# EAGLE board Pellet Sorter Arduino and Driver Wiring TinkerCAD (EAGLE 9.7.0)

Size 225.5 x 136.48 mm. Coordinates in mm from the lower left corner, seen from the top.
Outline: 0,0 225.5,0 225.5,136.48 0,136.48 0,0
Copper layers (1*16): Top 0.035mm / dielectric 1.5mm / Bottom 0.035mm
Design rules "default": minimum track width 6mil, minimum drill 0.35mm, track to track 6mil, track to pad 6mil, pad to pad 6mil, via to via 6mil, smd to smd 6mil, copper to edge 40mil, drill to drill 6mil, minimum pad ring 10mil, minimum via ring 8mil, stop-mask expansion 4mil, vias tented up to drill 0mil, thermal gap 10mil

## Footprints (pad centres in the part's own frame; a part is rotated, then mirrored left to right if it is on the bottom)
CAP-THRU-2.54MM = drill 1.016 pad 1.88: 1 -1.27,0; 2 1.27,0
1X06 = drill 1.016 long: 1 -6.35,0; 2 -3.81,0; 3 -1.27,0; 4 1.27,0; 5 3.81,0; 6 6.35,0
BATTERY-GENERIC = drill 1.118 pad 3.15 octagon: + 2.54,0; - -2.54,0
ARDUINO-UNO-R3-SHIELD = drill 1.016 pad 1.88: 3.3V 24.13,-2.54; 5V 24.13,0; A0 24.13,12.7; A1 24.13,15.24; A2 24.13,17.78; A3 24.13,20.32; A4 24.13,22.86; A5 24.13,25.4; AREF -24.13,-13.97; D2 -24.13,20.32; D3 -24.13,17.78; D4 -24.13,15.24; D5 -24.13,12.7; D6 -24.13,10.16; D7 -24.13,7.62; D8 -24.13,3.81; D9 -24.13,1.27; D10 -24.13,-1.27; D11 -24.13,-3.81; D12 -24.13,-6.35; D13 -24.13,-8.89; GND@0 24.13,2.54; GND@1 24.13,5.08; GND@2 -24.13,-11.43; IOREF 24.13,-7.62; NC 24.13,-10.16; RES 24.13,-5.08; RX -24.13,25.4; SCL -24.13,-19.05; SDA -24.13,-16.51; TX -24.13,22.86; VIN 24.13,7.62
DIP762W53P254L1969H508Q16B = drill 0.743 pad 1.343: 1 -3.81,8.89; 2 -3.81,6.35; 3 -3.81,3.81; 4 -3.81,1.27; 5 -3.81,-1.27; 6 -3.81,-3.81; 7 -3.81,-6.35; 8 -3.81,-8.89; 9 3.81,-8.89; 10 3.81,-6.35; 11 3.81,-3.81; 12 3.81,-1.27; 13 3.81,1.27; 14 3.81,3.81; 15 3.81,6.35; 16 3.81,8.89

## Placement (x,y rotation side)
C1  100u  [CAP-THRU-2.54MM]  146.44,28.06 90 top
C2  100u  [CAP-THRU-2.54MM]  146.44,48.38 90 top
C3  100u  [CAP-THRU-2.54MM]  146.44,68.7 90 top
MBOTTOM_STEPPER_MOTOR_(SMALL)  PINHD-1X06_1X06M  [1X06]  218.67,41.89 270 top
MTOP_STEPPER_MOTOR_(NEMA17)  PINHD-1X06_1X06M  [1X06]  218.61,10.79 270 top
MVALVE_STEPPER_MOTOR_(SMALL)  PINHD-1X06_1X06M  [1X06]  219.22,67.06 270 top
P1  BATTERYGENERIC  [BATTERY-GENERIC]  145.14,128.22 180 top
U1  ARDUINO-UNO-R3-SHIELD  [ARDUINO-UNO-R3-SHIELD]  29.84,52.55 180 top
UA4988_DRIVER_-_BOTTOM  L293E  [DIP762W53P254L1969H508Q16B]  135.01,40.76 180 top
UA4988_DRIVER_-_TOP  L293E  [DIP762W53P254L1969H508Q16B]  134.92,19.91 180 top
UA4988_DRIVER_-_VALVE  L293E  [DIP762W53P254L1969H508Q16B]  135.01,61.08 180 top

## Library data of the parts
C1-C3 MBOTTOM_STEPPER_MOTOR_(SMALL) MTOP_STEPPER_MOTOR_(NEMA17) MVALVE_STEPPER_MOTOR_(SMALL) P1 U1 UA4988_DRIVER_-_BOTTOM UA4988_DRIVER_-_TOP UA4988_DRIVER_-_VALVE = Tinkercad

## Nets
MBOTTOM_STEPPER_MOTOR_(SMALL)_3: MBOTTOM_STEPPER_MOTOR_(SMALL).3 UA4988_DRIVER_-_BOTTOM.6
MBOTTOM_STEPPER_MOTOR_(SMALL)_5: MBOTTOM_STEPPER_MOTOR_(SMALL).5 UA4988_DRIVER_-_BOTTOM.3
MBOTTOM_STEPPER_MOTOR_(SMALL)_6: C1.1 C2.1 C3.1 MBOTTOM_STEPPER_MOTOR_(SMALL).4 MBOTTOM_STEPPER_MOTOR_(SMALL).6 MVALVE_STEPPER_MOTOR_(SMALL).4 MVALVE_STEPPER_MOTOR_(SMALL).6 P1.- U1.5V U1.GND@0 U1.GND@1 U1.GND@2 UA4988_DRIVER_-_BOTTOM.1 UA4988_DRIVER_-_BOTTOM.2 UA4988_DRIVER_-_BOTTOM.4 UA4988_DRIVER_-_BOTTOM.5 UA4988_DRIVER_-_BOTTOM.7 UA4988_DRIVER_-_BOTTOM.9 UA4988_DRIVER_-_BOTTOM.10 UA4988_DRIVER_-_BOTTOM.11 UA4988_DRIVER_-_BOTTOM.12 UA4988_DRIVER_-_BOTTOM.13 UA4988_DRIVER_-_VALVE.1 UA4988_DRIVER_-_VALVE.2 UA4988_DRIVER_-_VALVE.4 UA4988_DRIVER_-_VALVE.5 UA4988_DRIVER_-_VALVE.7 UA4988_DRIVER_-_VALVE.9 UA4988_DRIVER_-_VALVE.10 UA4988_DRIVER_-_VALVE.11 UA4988_DRIVER_-_VALVE.12 UA4988_DRIVER_-_VALVE.13
MVALVE_STEPPER_MOTOR_(SMALL)_3: MVALVE_STEPPER_MOTOR_(SMALL).3 UA4988_DRIVER_-_VALVE.6
MVALVE_STEPPER_MOTOR_(SMALL)_5: MVALVE_STEPPER_MOTOR_(SMALL).5 UA4988_DRIVER_-_VALVE.3
P1+: C1.2 C2.2 C3.2 P1.+ UA4988_DRIVER_-_BOTTOM.8 UA4988_DRIVER_-_VALVE.8
U1_D5: U1.D5 UA4988_DRIVER_-_BOTTOM.16
U1_D6: U1.D6 UA4988_DRIVER_-_BOTTOM.15
U1_D7: U1.D7 UA4988_DRIVER_-_BOTTOM.14
U1_D8: U1.D8 UA4988_DRIVER_-_VALVE.16
U1_D9: U1.D9 UA4988_DRIVER_-_VALVE.15
U1_D10: U1.D10 UA4988_DRIVER_-_VALVE.14

## Tracks (layer width: path | path; a pad name or v marks a point on that pad's centre or on a via)
MBOTTOM_STEPPER_MOTOR_(SMALL)_3  (1 unrouted)
MBOTTOM_STEPPER_MOTOR_(SMALL)_5  (1 unrouted)
MBOTTOM_STEPPER_MOTOR_(SMALL)_6  (31 unrouted)
MVALVE_STEPPER_MOTOR_(SMALL)_3  (1 unrouted)
MVALVE_STEPPER_MOTOR_(SMALL)_5  (1 unrouted)
P1+  (5 unrouted)
U1_D5  (1 unrouted)
U1_D6  (1 unrouted)
U1_D7  (1 unrouted)
U1_D8  (1 unrouted)
U1_D9  (1 unrouted)
U1_D10  (1 unrouted)